# Altium PCB adapter.PcbDoc
Units mm, origin at the board's own origin, x right, y up, seen from the top; angles counter-clockwise.
Board outline 16.25 x 27.5 mm, 2 copper layers (Top Layer, Bottom Layer), stack 1.57 mm thick; 3 components, 40 nets, 126 pads, 40 vias.
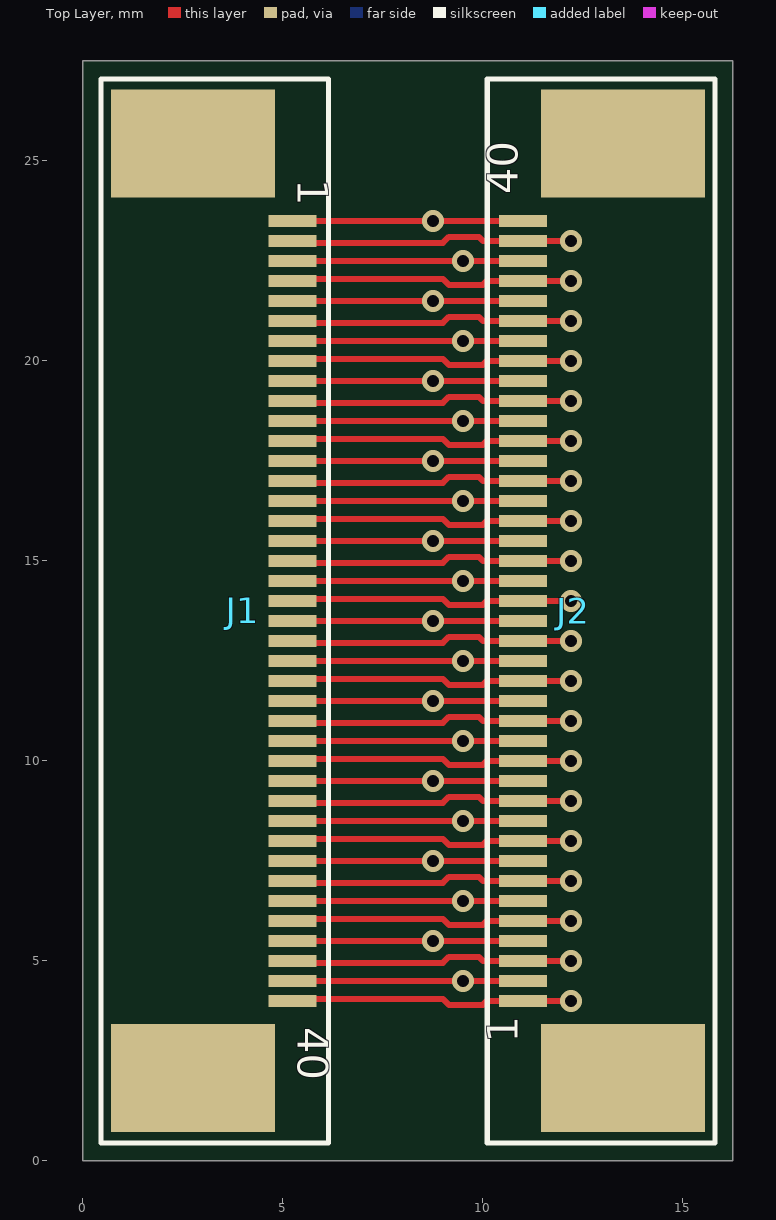
[diagram p0: Top Layer view]
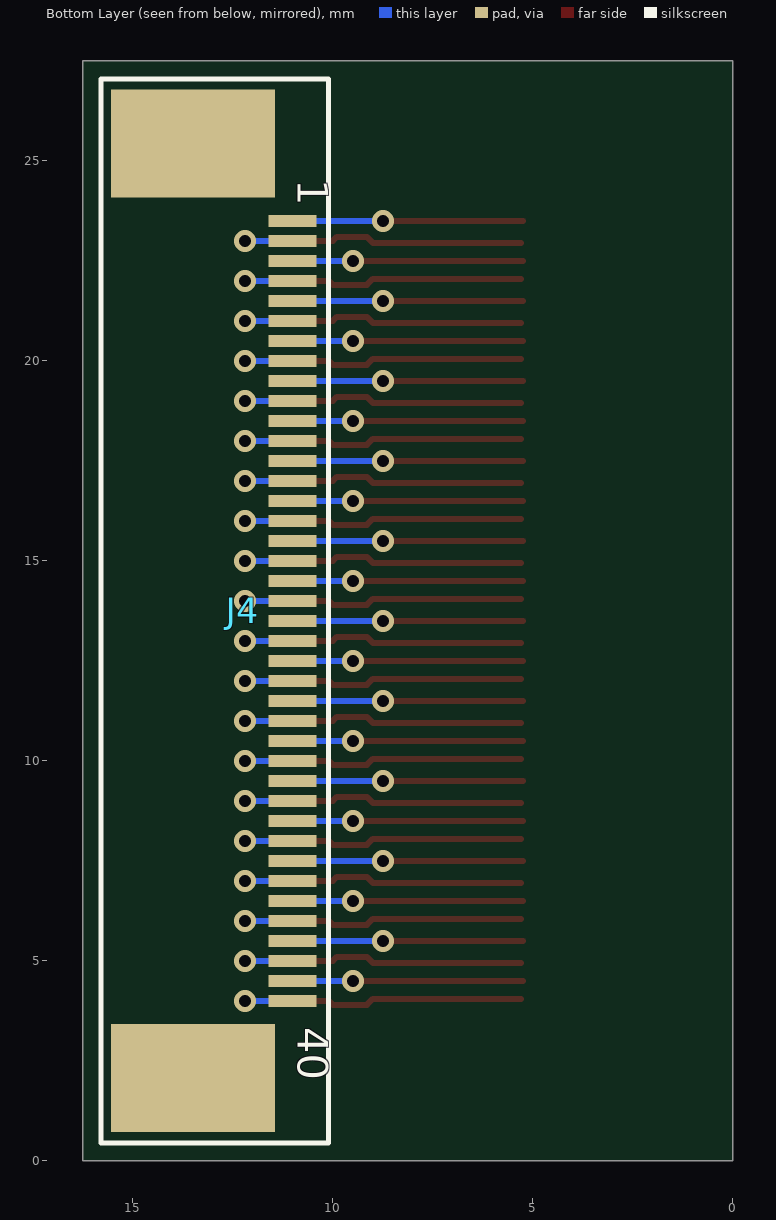
[diagram p1: Bottom Layer view, seen from below]

## Layer stack, top to bottom
Top Solder: solder mask 0.01, Solder Resist, Dk 3.5
Top Layer: signal copper 0.035
Dielectric1: core 1.5, FR-4, Dk 4.2
Bottom Layer: signal copper 0.035
Bottom Solder: solder mask 0.01, Solder Resist, Dk 3.5

## Board outline
0,0 0,27.5 16.25,27.5 16.25,0

## Design rules (kind name [scope] priority, off if disabled: settings)
Clearance [All] p1: gap=0.15 ignorepadtopadclearanceinfootprint=FALSE
ComponentClearance ComponentClearance_logo [HasFootprint('Develer_logo_30x12mm_PCB_NOTE') vs HasFootprint('Develer_logo_30x12mm_TB_Top')] p1: gap=0 collisioncheckmode=3 verticalgap=0 showdistances=FALSE
ComponentClearance [All] p2: gap=0.25 collisioncheckmode=3 verticalgap=0.25 showdistances=FALSE
DiffPairsRouting [All] p1: maxlimit=0.25 minlimit=0.25 mostfreqgap=0.25 toplayer_minwidth=0.25 toplayer_maxwidth=0.25 toplayer_prefwidth=0.25 bottomlayer_minwidth=0.25 bottomlayer_maxwidth=0.25 bottomlayer_prefwidth=0.25 maxuncoupledlength=12.7
Height [All] p1: minheight=0 maxheight=25 prefheight=12.5
HoleSize [All] p1: absolutevalues=TRUE maxlimit=10 minlimit=0.2 maxpercent=80.000 minpercent=20.000
HoleToHoleClearance [All] p1: gap=0.25 allowstackedmicrovias=TRUE
MinimumSolderMaskSliver [All] p1: minsoldermaskwidth=0.15
PlaneClearance [All] p1: clearance=0.5
PlaneConnect PlaneConnect_via [isvia] p1: planeconnectstyle=Direct reliefexpansion=0.508 reliefentries=4 reliefconductorwidth=0.254 reliefairgap=0.254
PlaneConnect [All] p2: planeconnectstyle=Relief reliefexpansion=0.6 reliefentries=4 reliefconductorwidth=0.6 reliefairgap=0.3
PolygonConnect PolygonConnect_via [isvia] p1: connectstyle=Direct reliefconductorwidth=0.254 reliefentries=4 polygonreliefangle="90 Angle" airgapwidth=0.254
PolygonConnect [All] p2: connectstyle=Relief reliefconductorwidth=0.6 reliefentries=4 polygonreliefangle="90 Angle" airgapwidth=0.6
RoutingCorners [All] p1: cornerstyle=45-Degree minsetback=2.5 maxsetback=2.5
RoutingVias [All] p1: holewidth=0.3 width=0.6 viastyle="Through Hole" minholewidth=0.2 minwidth=0.3 maxholewidth=0.5 maxwidth=1
SilkToSilkClearance [All] p1: silktosilkclearance=0.15
SilkToSolderMaskClearance [IsPad] p1: minsilkscreentomaskgap=0.15 clearancetoexposedcopper=TRUE
SolderMaskExpansion SolderMaskExpansion_via [isVia] p1: expansion=-10
SolderMaskExpansion [All] p2: expansion=0.05
UnRoutedNet [All] p1: checkbadconnections=TRUE
Width [All] p1: maxlimit=5 minlimit=0.15 preferedwidth=0.25
18 further rules are at their usual default settings.

## Components (designator, comment, footprint, x,y, rotation, side; value= is the part's Value field where it differs from the comment)
J1 "Display LCD 4.3''" fcc-zif_40pin_0.5mm 4.25,13.75 r270 top locked
J2 "Display LCD 4.3''" fcc-zif_40pin_0.5mm 12,13.75 r90 top locked
J4 "Display LCD 4.3''" fcc-zif_40pin_0.5mm 12,13.75 r270 bottom locked

## Footprints (in the part's own frame and the unit in brackets; to place one, negate y for a bottom-side part, rotate by r counter-clockwise, add the part's x,y. Pads: shape width x height; smd on the part's side, far side on the other; paste and mask are expansions set on the pad)
fcc-zif_40pin_0.5mm [mm] "40 pins"
  rect 0.3x1.2 smd: 1(-9.75,0.99) 2(-9.25,0.99) 3(-8.75,0.99) 4(-8.25,0.99) 5(-7.75,0.99) 6(-7.25,0.99) 7(-6.75,0.99) 8(-6.25,0.99) 9(-5.75,0.99) 10(-5.25,0.99) 11(-4.75,0.99) 12(-4.25,0.99) 13(-3.75,0.99) 14(-3.25,0.99) 15(-2.75,0.99) 16(-2.25,0.99) 17(-1.75,0.99) 18(-1.25,0.99) 19(-0.75,0.99) 20(-0.25,0.99) 21(0.25,0.99) 22(0.75,0.99) 23(1.25,0.99) 24(1.75,0.99) 25(2.25,0.99) 26(2.75,0.99) 27(3.25,0.99) 28(3.75,0.99) 29(4.25,0.99) 30(4.75,0.99) 31(5.25,0.99) 32(5.75,0.99) 33(6.25,0.99) 34(6.75,0.99) 35(7.25,0.99) 36(7.75,0.99) 37(8.25,0.99) 38(8.75,0.99) 39(9.25,0.99) 40(9.75,0.99)
  rect 2.7x4.1 smd: Z1(-11.68,-1.5) Z2(11.68,-1.5)
  silkscreen extent -13.3,-3.8 13.3,1.89, body extent -13.2,-3.8 13.2,1.3, height 2.06

## Part data
J1 J2 J4: library part "Header 40", "40-pin, 0.5mm, SMT, ZIF, Horizontal, Top Contact (WE 68714014022; Molex: 54104-4031)", LatestRevisionDate=17-Jul-2002, LatestRevisionNote="Re-released for DXP Platform.", Publisher="Altium Limited"

## Via types
v1: diameter 0.55, hole 0.3, Top Layer to Bottom Layer, 40 vias

## Nets (pads, with @x,y where several pads share a name; then routed paths per layer and width w, separated by ;. In a path a pad name is that pad's centre, name@x,y a point inside that pad or via, vN(x,y) a via of type N, cw(c..) or ccw(c..) an arc to the next point about the centre after c; other vN are vias at no path point)
NetJ1_1: J1.1 J2.40 J4.1 | length 8
  Top Layer w0.15: J1.1 v1(8.75,23.5) J2.40
  Bottom Layer w0.15: v1(8.75,23.5) J4.1
NetJ1_2: J1.2 J2.39 J4.2 | length 8.2
  Top Layer w0.15: J1.2@5.29,22.95 9,22.95 9.15,23.1 9.9,23.1 10,23 J2.39 v1(12.2,23)
  Bottom Layer w0.15: J4.2 v1(12.2,23)
NetJ1_3: J1.3 J2.38 J4.3 | length 7.3
  Top Layer w0.15: J1.3 v1(9.5,22.5) J2.38
  Bottom Layer w0.15: v1(9.5,22.5) J4.3
NetJ1_4: J1.4 J2.37 J4.4 | length 8.2
  Top Layer w0.15: J1.4@5.29,22.05 9,22.05 9.15,21.9 10,21.9 10.1,22 J2.37 v1(12.2,22)
  Bottom Layer w0.15: J4.4 v1(12.2,22)
NetJ1_5: J1.5 J2.36 J4.5 | length 8
  Top Layer w0.15: J1.5 v1(8.75,21.5) ; v1(8.75,21.5) J2.36
  Bottom Layer w0.15: v1(8.75,21.5) J4.5
NetJ1_6: J1.6 J2.35 J4.6 | length 8.2
  Top Layer w0.15: J1.6@5.29,20.95 9,20.95 9.15,21.1 9.9,21.1 10,21 J2.35 v1(12.2,21)
  Bottom Layer w0.15: J4.6 v1(12.2,21)
NetJ1_7: J1.7 J2.34 J4.7 | length 7.3
  Top Layer w0.15: J1.7 v1(9.5,20.5) J2.34
  Bottom Layer w0.15: v1(9.5,20.5) J4.7
NetJ1_8: J1.8 J2.33 J4.8 | length 8.2
  Top Layer w0.15: J1.8@5.29,20.05 9,20.05 9.15,19.9 10,19.9 10.1,20 J2.33 v1(12.2,20)
  Bottom Layer w0.15: J4.8 v1(12.2,20)
NetJ1_9: J1.9 J2.32 J4.9 | length 8
  Top Layer w0.15: J1.9 v1(8.75,19.5) J2.32
  Bottom Layer w0.15: v1(8.75,19.5) J4.9
NetJ1_10: J1.10 J2.31 J4.10 | length 8.2
  Top Layer w0.15: J1.10@5.29,18.95 9,18.95 9.15,19.1 9.9,19.1 10,19 J2.31 v1(12.2,19)
  Bottom Layer w0.15: J4.10 v1(12.2,19)
NetJ1_11: J1.11 J2.30 J4.11 | length 7.3
  Top Layer w0.15: J1.11 v1(9.5,18.5) J2.30
  Bottom Layer w0.15: v1(9.5,18.5) J4.11
NetJ1_12: J1.12 J2.29 J4.12 | length 8.2
  Top Layer w0.15: J1.12@5.29,18.05 9,18.05 9.15,17.9 10,17.9 10.1,18 J2.29 v1(12.2,18)
  Bottom Layer w0.15: J4.12 v1(12.2,18)
NetJ1_13: J1.13 J2.28 J4.13 | length 8
  Top Layer w0.15: J1.13 v1(8.75,17.5) J2.28
  Bottom Layer w0.15: v1(8.75,17.5) J4.13
NetJ1_14: J1.14 J2.27 J4.14 | length 8.2
  Top Layer w0.15: J1.14@5.29,16.95 9,16.95 9.15,17.1 9.9,17.1 10,17 J2.27 v1(12.2,17)
  Bottom Layer w0.15: J4.14 v1(12.2,17)
NetJ1_15: J1.15 J2.26 J4.15 | length 7.3
  Top Layer w0.15: J1.15 v1(9.5,16.5) J2.26
  Bottom Layer w0.15: v1@9.4,16.5 J4.15@10.91,16.5
NetJ1_16: J1.16 J2.25 J4.16 | length 8.2
  Top Layer w0.15: J1.16@5.29,16.05 9,16.05 9.15,15.9 10,15.9 10.1,16 J2.25 v1(12.2,16)
  Bottom Layer w0.15: J4.16@10.91,16 v1@12.1,16
NetJ1_17: J1.17 J2.24 J4.17 | length 8
  Top Layer w0.15: J1.17 v1(8.75,15.5) J2.24
  Bottom Layer w0.15: v1(8.75,15.5) J4.17
NetJ1_18: J1.18 J2.23 J4.18 | length 8.2
  Top Layer w0.15: J1.18@5.29,14.95 9,14.95 9.15,15.1 9.9,15.1 10,15 J2.23 v1(12.2,15)
  Bottom Layer w0.15: J4.18 v1(12.2,15)
NetJ1_19: J1.19 J2.22 J4.19 | length 7.3
  Top Layer w0.15: J1.19 v1(9.5,14.5) J2.22
  Bottom Layer w0.15: v1(9.5,14.5) J4.19
NetJ1_20: J1.20 J2.21 J4.20 | length 8.2
  Top Layer w0.15: J1.20@5.29,14.05 9,14.05 9.15,13.9 10,13.9 10.1,14 J2.21 v1(12.2,14)
  Bottom Layer w0.15: J4.20 v1(12.2,14)
NetJ1_21: J1.21 J2.20 J4.21 | length 8
  Top Layer w0.15: J1.21 v1(8.75,13.5) J2.20
  Bottom Layer w0.15: v1(8.75,13.5) J4.21
NetJ1_22: J1.22 J2.19 J4.22 | length 8.2
  Top Layer w0.15: J1.22@5.29,12.95 9,12.95 9.15,13.1 9.9,13.1 10,13 J2.19 v1(12.2,13)
  Bottom Layer w0.15: J4.22 v1(12.2,13)
NetJ1_23: J1.23 J2.18 J4.23 | length 7.3
  Top Layer w0.15: J1.23 v1(9.5,12.5) J2.18
  Bottom Layer w0.15: v1(9.5,12.5) J4.23
NetJ1_24: J1.24 J2.17 J4.24 | length 8.2
  Top Layer w0.15: J1.24@5.29,12.05 9,12.05 9.15,11.9 10,11.9 10.1,12 J2.17 v1(12.2,12)
  Bottom Layer w0.15: J4.24 v1(12.2,12)
NetJ1_25: J1.25 J2.16 J4.25 | length 8
  Top Layer w0.15: J1.25 v1(8.75,11.5) ; v1(8.75,11.5) J2.16
  Bottom Layer w0.15: v1(8.75,11.5) J4.25
NetJ1_26: J1.26 J2.15 J4.26 | length 8.2
  Top Layer w0.15: J1.26@5.29,10.95 9,10.95 9.15,11.1 9.9,11.1 10,11 J2.15 v1(12.2,11)
  Bottom Layer w0.15: J4.26 v1(12.2,11)
NetJ1_27: J1.27 J2.14 J4.27 | length 7.3
  Top Layer w0.15: J1.27 v1(9.5,10.5) J2.14
  Bottom Layer w0.15: v1(9.5,10.5) J4.27
NetJ1_28: J1.28 J2.13 J4.28 | length 8.2
  Top Layer w0.15: J1.28@5.29,10.05 9,10.05 9.15,9.9 10,9.9 10.1,10 J2.13 v1(12.2,10)
  Bottom Layer w0.15: J4.28 v1(12.2,10)
NetJ1_29: J1.29 J2.12 J4.29 | length 8
  Top Layer w0.15: J1.29 v1(8.75,9.5) J2.12
  Bottom Layer w0.15: v1(8.75,9.5) J4.29
NetJ1_30: J1.30 J2.11 J4.30 | length 8.2
  Top Layer w0.15: J1.30@5.29,8.95 9,8.95 9.15,9.1 9.9,9.1 10,9 J2.11 v1(12.2,9)
  Bottom Layer w0.15: J4.30 v1(12.2,9)
NetJ1_31: J1.31 J2.10 J4.31 | length 7.3
  Top Layer w0.15: J1.31 v1(9.5,8.5) J2.10
  Bottom Layer w0.15: v1(9.5,8.5) J4.31
NetJ1_32: J1.32 J2.9 J4.32 | length 8.2
  Top Layer w0.15: J1.32@5.29,8.05 9,8.05 9.15,7.9 10,7.9 10.1,8 J2.9 v1(12.2,8)
  Bottom Layer w0.15: J4.32 v1(12.2,8)
NetJ1_33: J1.33 J2.8 J4.33 | length 8
  Top Layer w0.15: J1.33 v1(8.75,7.5) J2.8
  Bottom Layer w0.15: v1(8.75,7.5) J4.33
NetJ1_34: J1.34 J2.7 J4.34 | length 8.2
  Top Layer w0.15: J1.34@5.29,6.95 9,6.95 9.15,7.1 9.9,7.1 10,7 J2.7 v1(12.2,7)
  Bottom Layer w0.15: J4.34 v1(12.2,7)
NetJ1_35: J1.35 J2.6 J4.35 | length 7.3
  Top Layer w0.15: J1.35 v1(9.5,6.5) J2.6
  Bottom Layer w0.15: v1(9.5,6.5) J4.35
NetJ1_36: J1.36 J2.5 J4.36 | length 8.2
  Top Layer w0.15: J1.36@5.29,6.05 9,6.05 9.15,5.9 10,5.9 10.1,6 J2.5 v1(12.2,6)
  Bottom Layer w0.15: J4.36 v1(12.2,6)
NetJ1_37: J1.37 J2.4 J4.37 | length 8
  Top Layer w0.15: J1.37 v1(8.75,5.5) J2.4
  Bottom Layer w0.15: v1(8.75,5.5) J4.37
NetJ1_38: J1.38 J2.3 J4.38 | length 8.2
  Top Layer w0.15: J1.38@5.29,4.95 9,4.95 9.15,5.1 9.9,5.1 10,5 J2.3 v1(12.2,5)
  Bottom Layer w0.15: J4.38 v1(12.2,5)
NetJ1_39: J1.39 J2.2 J4.39 | length 7.3
  Top Layer w0.15: J1.39 v1(9.5,4.5) J2.2
  Bottom Layer w0.15: v1(9.5,4.5) J4.39
NetJ1_40: J1.40 J2.1 J4.40 | length 8.2
  Top Layer w0.15: J1.40@5.29,4.05 9,4.05 9.15,3.9 10,3.9 10.1,4 J2.1 v1(12.2,4)
  Bottom Layer w0.15: J4.40 v1(12.2,4)
pads on no net: J1.Z1 J1.Z2 J2.Z1 J2.Z2 J4.Z1 J4.Z2

## Silkscreen, mask and mechanical layers (free items; w line width, h text height)
Outline:
  the board outline again, w0.2
Drawing:
  text "Mechanical Characteristics" at 83.5,-64.5 h5
  text "Mechanical Characteristics" at 83.5,-64.5 h5
Assembly_top:
  text "Assembly TOP" at 83.5,-64.5 h5
Assembly_bot:
  text "Assembly Bottom" at -68.5,-64.25 h5
Note_top:
  text "Note TOP" at 83.5,-64.5 h5
Note_bot:
  text "Note Bottom" at -68.5,-64.25 h5
PCB_Note:
  drawing of 186 lines, arcs and shapes, not listed
  text "Plugged Vias" at 117.25,7.25 h5
  text "File Layer names:" at 115.25,4 h3.5
  text "GTO" at 115.25,0 h3
  text "Top Overlay" at 124.25,0 h3
  text "GTP" at 115.25,-3 h3
  text "Top Paste" at 124.25,-3 h3
  text "GTS" at 115.25,-6 h3
  text "Top Solder" at 124.25,-6 h3
  text "GTL" at 115.25,-9 h3
  text "Top Layer" at 124.25,-9 h3
  text "GBL" at 115.25,-12 h3
  text "Bottom Layer" at 124.25,-12 h3
  text "GBS" at 115.25,-15 h3
  text "Bottom Solder" at 124.25,-15 h3
  text "GBP" at 115.25,-18 h3
  text "Bottom Paste" at 124.25,-18 h3
  text "GBO" at 115.25,-21 h3
  text "Bottom Overlay" at 124.25,-21 h3
  text "GM1" at 115.25,-27 h3
  text "Outline" at 124.25,-27 h3
  text "GM7" at 115.25,-30 h3
  text "PCB_Note" at 124.25,-30 h3
  text "Layer" at 92.353,-35.546 h1.52
  text "Name" at 98.336,-35.546 h1.52
  text "Material" at 109.911,-35.546 h1.52
  text "Thickness" at 120.073,-35.546 h1.52
  text "Constant" at 128.524,-35.546 h1.52
  text "Board Layer Stack" at 136.443,-35.546 h1.52
  text "1" at 92.353,-38.594 h1.52
  text "Top Overlay" at 98.336,-38.594 h1.52
  text "2" at 92.353,-41.642 h1.52
  text "Top Solder" at 98.336,-41.642 h1.52
  text "Solder Resist" at 109.911,-41.642 h1.52
  text "0,39mil" at 120.073,-41.642 h1.52
  text "3,5" at 128.524,-41.642 h1.52
  text "3" at 92.353,-44.69 h1.52
  text "Top Layer" at 98.336,-44.69 h1.52
  text "Copper" at 109.911,-44.69 h1.52
  text "1,38mil" at 120.073,-44.69 h1.52
  text "4" at 92.353,-47.738 h1.52
  text "Dielectric1" at 98.336,-47.738 h1.52
  text "FR-4" at 109.911,-47.738 h1.52
  text "59,06mil" at 120.073,-47.738 h1.52
  text "4,2" at 128.524,-47.738 h1.52
  text "5" at 92.353,-50.786 h1.52
  text "Bottom Layer" at 98.336,-50.786 h1.52
  text "Copper" at 109.911,-50.786 h1.52
  text "1,38mil" at 120.073,-50.786 h1.52
  text "6" at 92.353,-53.834 h1.52
  text "Bottom Solder" at 98.336,-53.834 h1.52
  text "Solder Resist" at 109.911,-53.834 h1.52
  text "0,39mil" at 120.073,-53.834 h1.52
  text "3,5" at 128.524,-53.834 h1.52
  text "7" at 92.353,-56.882 h1.52
  text "Bottom Overlay" at 98.336,-56.882 h1.52
  text "PCB Note" at 83.5,-64.5 h5
  text "Board Name" at 83.5,-69.05 h3
  text ".prj_name" at 99.5,-69.05 h3
  text "P/N" at 83.5,-72.55 h3
  text ".prj_pn" at 99.5,-72.55 h3
  text "Author" at 83.5,-76.05 h3
  text "AUTHOR" at 99.5,-76.05 h3
  text "Date" at 83.5,-79.65 h3
  text ".prj_date" at 99.5,-79.65 h3
  text "Revision" at 83.5,-83.25 h3
  text ".prj_pcb" at 99.5,-83.25 h3
  text "A4" at 142,-83.25 h3
TitleBlock_top:
  lines w0.3: 56,-84 56,-66.5 82.5,-66.5 ; 82.5,-84 82.5,-72 ; 82.5,-80.5 150,-80.5 ; 82.5,-77 150,-77 ; 82.5,-73.5 150,-73.5 ; 82.5,-72.55 82.5,-70 ; 98.5,-84 98.5,-80.5 98.5,-77 98.5,-73.5 98.5,-70 ; 140,-84 140,-80.5 ; 150,-70 98.5,-70 ; 150,-66.5 98.5,-66.5 ; 150,-59.5 98.5,-59.5 82.5,-59.5 82.5,-63 82.5,-66.5 ; 82.5,-70 82.5,-66.5 ; 82.5,-70 98.5,-70 ; 82.5,-66.5 98.5,-66.5 ; 98.5,-70 98.5,-66.5 ; -140,-89 155,-89 155,121 -140,121 -140,-89 ; -135,-84 150,-84 150,116 -135,116 -135,-84
  text "Board Name" at 83.5,-69.05 h3
  text ".prj_name" at 99.5,-69.05 h3
  text "P/N" at 83.5,-72.55 h3
  text ".prj_pn" at 99.5,-72.55 h3
  text "Author" at 83.5,-76.05 h3
  text "AUTHOR" at 99.5,-76.05 h3
  text "Date" at 83.5,-79.65 h3
  text ".prj_date" at 99.5,-79.65 h3
  text "Revision" at 83.5,-83.25 h3
  text ".prj_pcb" at 99.5,-83.25 h3
  text "A4" at 142,-83.25 h3
TitleBlock_bot:
  lines w0.3: -140,-89 -140,121 155,121 ; -135,-84 -135,116 150,116 ; -135,-80.5 -67.5,-80.5 ; -135,-77 -67.5,-77 ; -135,-73.5 -67.5,-73.5 ; -135,-70 -83.5,-70 ; -135,-66.5 -83.5,-66.5 ; -135,-59.5 -83.5,-59.5 -67.5,-59.5 -67.5,-63 -67.5,-66.5 ; -125,-84 -125,-80.5 ; -83.5,-84 -83.5,-80.5 -83.5,-77 -83.5,-73.5 -83.5,-70 ; -67.5,-84 -67.5,-72 ; -67.5,-72.55 -67.5,-70 ; -41,-84 -41,-66.5 -67.5,-66.5 ; -83.5,-70 -83.5,-66.5 ; -83.5,-70 -67.5,-70 ; -83.5,-66.5 -67.5,-66.5 ; -67.5,-70 -67.5,-66.5
  text ".prj_name" at -84.5,-69.05 h3
  text "Board Name" at -68.5,-69.05 h3
  text ".prj_pn" at -84.5,-72.55 h3
  text "P/N" at -68.5,-72.55 h3
  text "AUTHOR" at -84.5,-76.05 h3
  text "Author" at -68.5,-76.05 h3
  text ".prj_date" at -84.5,-79.65 h3
  text "Date" at -68.5,-79.65 h3
  text "A4" at -127,-83.25 h3
  text ".prj_pcb" at -84.5,-83.25 h3
  text "Revision" at -68.5,-83.25 h3

## Text inside footprints (layer, text, board x,y; h text height)
J1: Top Overlay "40" at 5.121,3.336 h1.3 r270; Top Overlay "1" at 5.121,24.545 h1.3 r270
J2: Top Overlay "40" at 11.129,24.164 h1.3 r90; Top Overlay "1" at 11.129,2.955 h1.3 r90
J4: Bottom Overlay "40" at 11.129,3.336 h1.3 r90; Bottom Overlay "1" at 11.129,24.545 h1.3 r90